# EAGLE board H1maria_placa v167 (EAGLE 9.7.0)
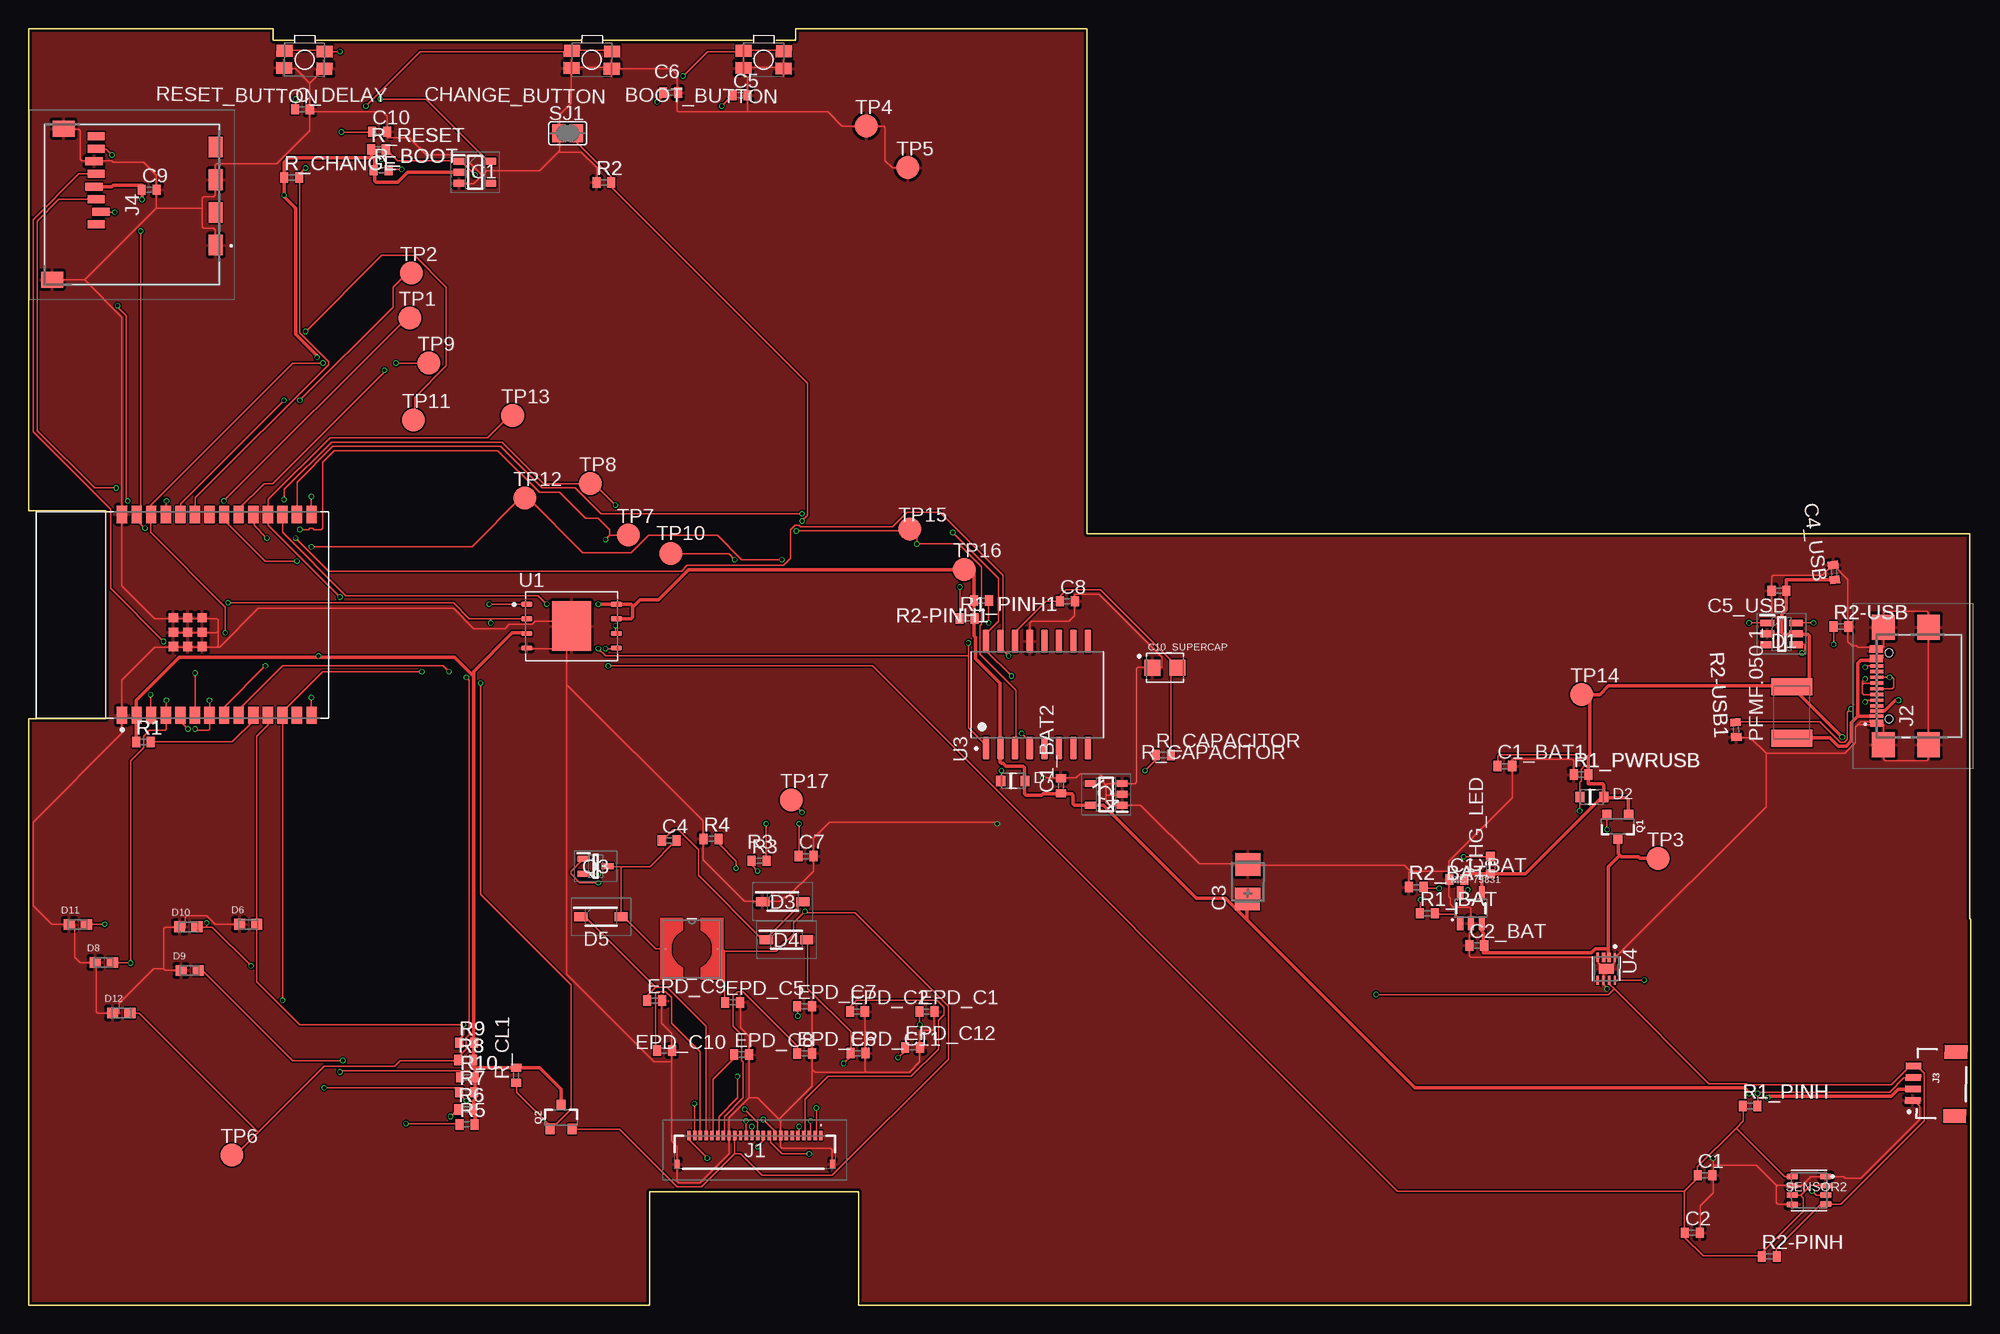
[diagram p0: board, top side]
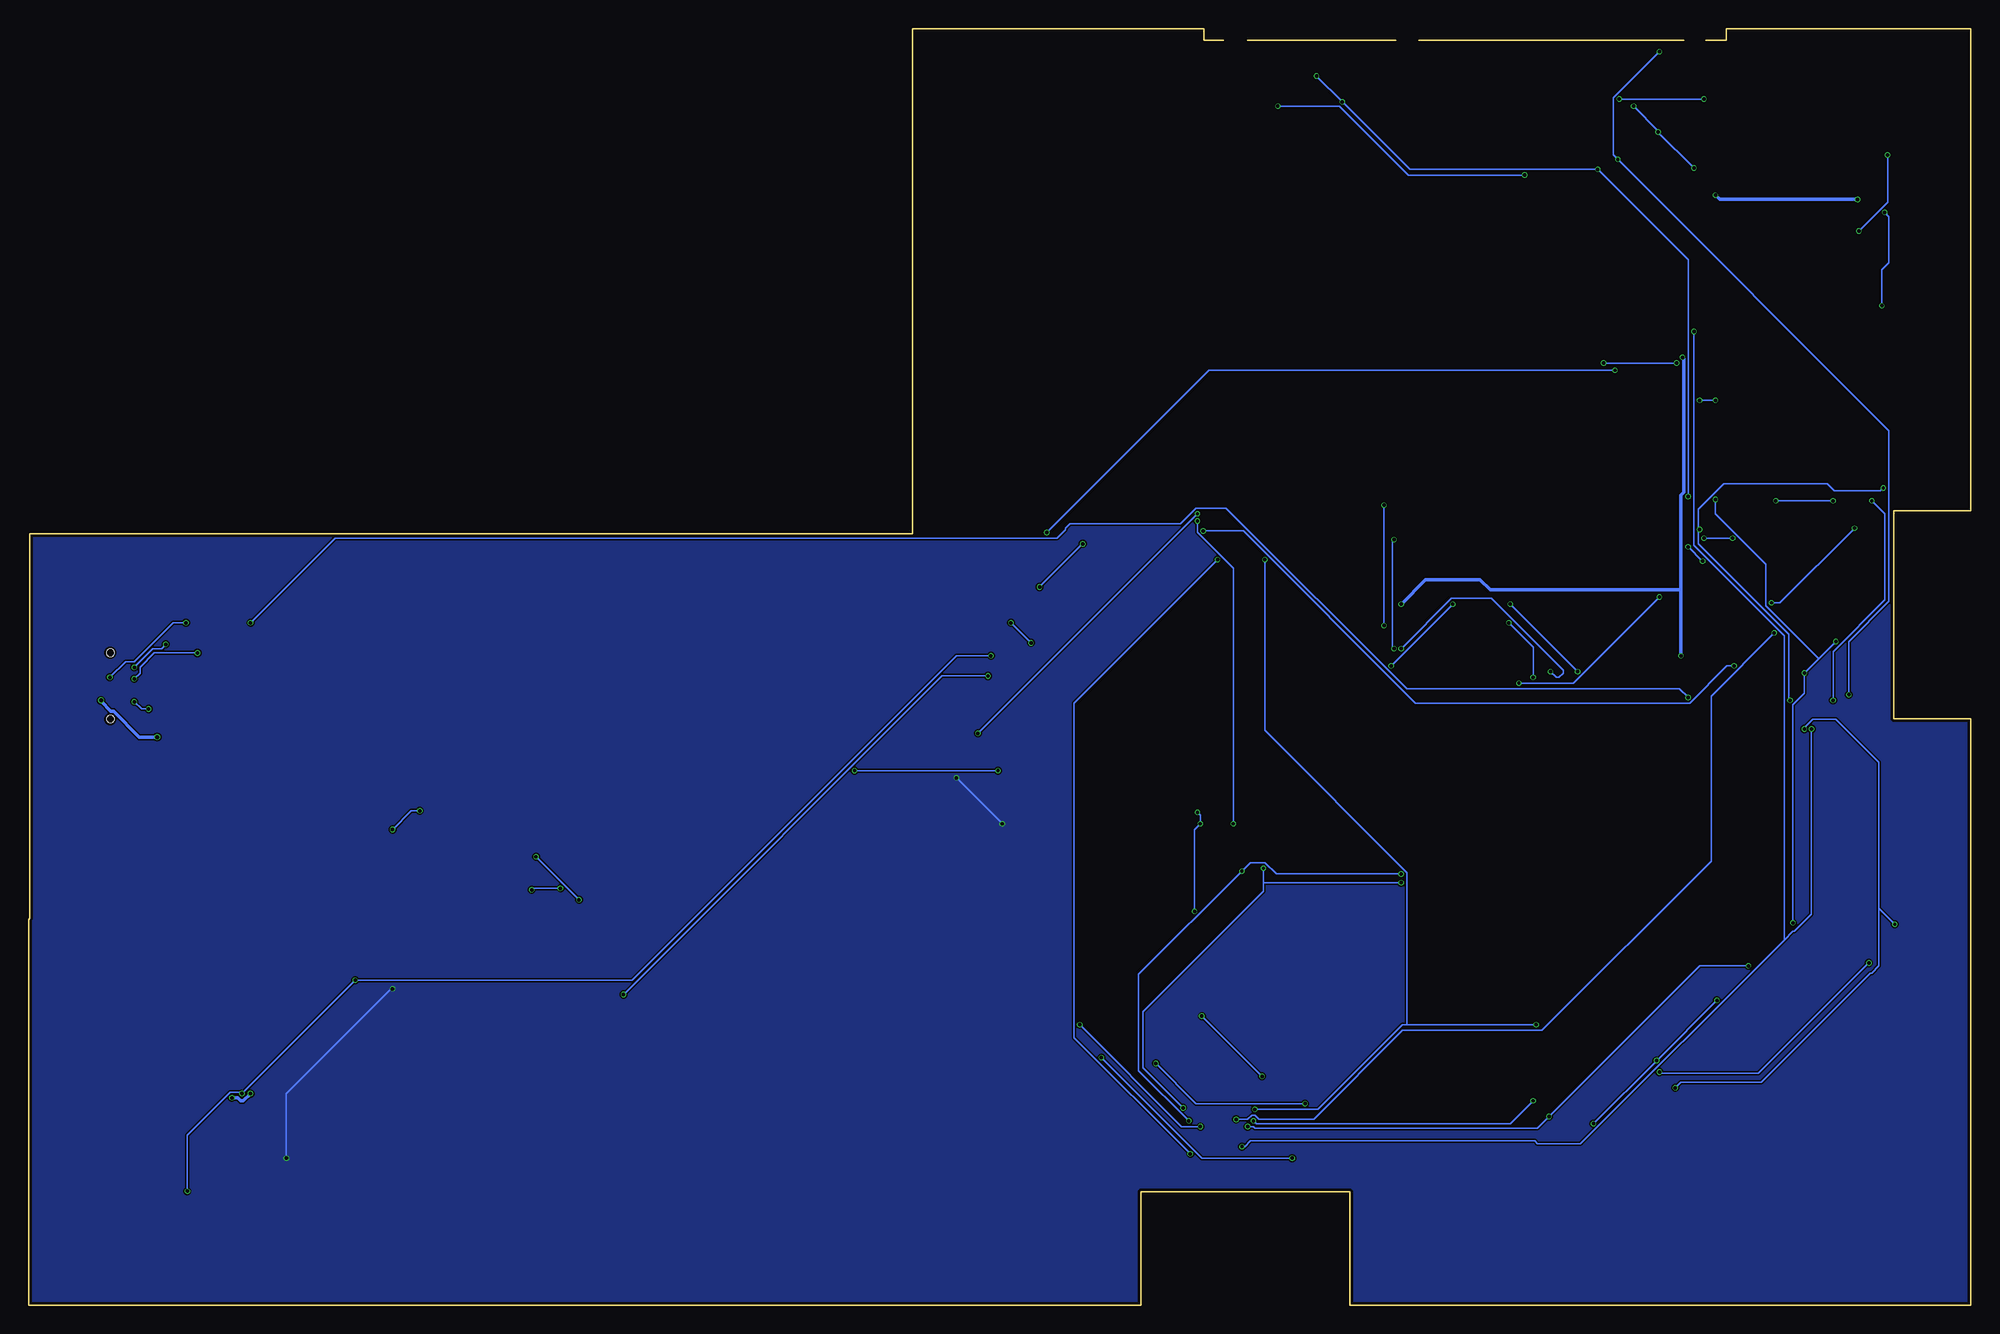
[diagram p1: board, bottom side, seen from below]

Size 169.2 x 111.17 mm. Coordinates in mm from the lower left corner, seen from the top.
Outline: 23.1,110.17 21.3,110.17 21.3,111.17 0,111.17 0,69.17 6.7,69.17 6.7,51.07 0,51.07 0,0 54.1,0 54.1,9.87 72.3,9.87 72.3,0 169.2,0 169.2,33.57 169.1,33.67 169.1,67.17 92.2,67.17 92.2,111.17 66.8,111.17 66.8,110.17 65.1,110.17
Outline: 25,110.17 48.1,110.17
Outline: 50.1,110.17 63,110.17
Copper layers (1*16): Top 0.035mm / dielectric 1.6mm / Bottom 0.035mm
Design rules "jlcpcb-2layers.dru": minimum track width 5mil, minimum drill 0.3mm, track to track 5mil, track to pad 5mil, pad to pad 5mil, via to via 5mil, smd to smd 5mil, copper to edge 0.2mm, drill to drill 6mil, minimum pad ring 10mil, minimum via ring 3mil, stop-mask expansion 4mil, vias tented up to drill 0mil, thermal gap 10mil
Net classes: 0 default: width 0.15 mm; 1 power: width 0.3 mm

## Footprints (pad centres in the part's own frame; a part is rotated, then mirrored left to right if it is on the bottom)
MYBUTTON = smd 1.4 x 1.05: 1 1.75,0.75; 2 -1.75,0.75; 3 -1.75,-0.75; 4 1.75,-0.75
ESP32_WROVER_EAGLE-LTSPICE_C0402 = smd 0.7 x 0.9: 1 -0.65,0; 2 0.65,0
EAGLE-LTSPICE_C0402 = smd 0.7 x 0.9: 1 -0.65,0; 2 0.65,0
RCL_CT3528 = smd 2 x 2.2: + -1.5,0; - 1.5,0
CAPCP3225X100N = smd 1.4 x 1.4: 1 -1.1,0; 2 1.1,0
ADAFRUIT_CHIP-LED0603 = smd 0.8 x 0.8: A 0,-0.75; C 0,0.75
SOT95P280X145-6N = smd 1.2 x 0.6: 1 -1.25,0.95; 2 -1.25,0; 3 -1.25,-0.95; 4 1.25,-0.95; 5 1.25,0; 6 1.25,0.95
ESP32_WROVER_AVX---SD0805S020S1R0_AVX_SD0805S020S1R0_0 = smd 0.8 x 0.9: 1 -1.05,0; 2 1.05,0
SOD3716X135N = smd 1.15 x 0.8: 1 -1.75,0; 2 1.75,0
DIOC1608X36N = smd 0.97 x 0.94: 1 -0.75,0; 2 0.75,0
SOT95P280X125-5N = smd 0.9 x 0.6: 1 -1.4,0.95; 2 -1.4,0; 3 -1.4,-0.95; 4 1.4,-0.95; 5 1.4,0.95
SOT95P280X120-5N = smd 0.9 x 0.6: 1 -1.4,0.95; 2 -1.4,0; 3 -1.4,-0.95; 4 1.4,-0.95; 5 1.4,0.95
FH34SRJ24S05SH99 = smd 0.3 x 0.8: 1 5.75,1.45; 2 5.25,1.45; 3 4.75,1.45; 4 4.25,1.45; 5 3.75,1.45; 6 3.25,1.45; 7 2.75,1.45; 8 2.25,1.45; 9 1.75,1.45; 10 1.25,1.45; 11 0.75,1.45; 12 0.25,1.45; 13 -0.25,1.45; 14 -0.75,1.45; 15 -1.25,1.45; 16 -1.75,1.45; 17 -2.25,1.45; 18 -2.75,1.45; 19 -3.25,1.45; 20 -3.75,1.45; 21 -4.25,1.45; 22 -4.75,1.45; 23 -5.25,1.45; 24 -5.75,1.45 | smd 0.4 x 0.8: MP1 6.75,-1.05; MP2 -6.75,-1.05
SAMACSYS_PARTS_USB4110GFA = smd 0.3 x 1.15: A1 -3.393,3.692; A4 -2.624,3.704; A5 -1.25,3.678; A6 -0.25,3.678; A7 0.25,3.678; A8 1.25,3.678; A9 2.555,3.708; A12 3.37,3.718; B1 3.04,3.749; B4 2.225,3.713; B5 1.75,3.678; B6 0.75,3.678; B7 -0.75,3.678; B8 -1.75,3.678; B9 -2.183,3.684; B12 -3.081,3.704 | smd 2.18 x 2: MP1 -5.11,-0.827; MP2 5.11,-0.827; MP3 -5.11,3.103; MP4 5.11,3.103 | hole 0.65: -2.89,2.603; 2.89,2.603
JST04_1MM_RA = smd 0.6 x 1.35: 1 -1.5,0; 2 -0.5,0; 3 0.5,0; 4 1.5,0 | smd 1.2 x 2: NC1 2.8,-3.675; NC2 -2.8,-3.675
112ATAARR03ATTEND = smd 1.8 x 1.2: G1 10.6,10.4; G2 4.9,10.4; S1 7.75,10.4; S2 2.05,10.4 | smd 1.4 x 1.9: G3 13.6,-3.85; G4 0.45,-2.85 | smd 0.7 x 1.5: P1 8.8,0; P2 7.7,0.4; P3 6.6,0; P4 5.5,-0.2; P5 4.4,0; P6 3.3,-0.2; P7 2.2,0; P8 1.1,0
IND_4828-WE-TPC_WRE = smd 0.127 x 0.127: 1 -2.286,0; 2 2.286,0
ESP32_WROVER_SPARKFUN-IC-POWER_SOT23-5 = smd 0.55 x 1.2: 1 -0.95,-1.3; 2 0,-1.3; 3 0.95,-1.3; 4 0.95,1.3; 5 -0.95,1.3
ESP32C6_VARISTOR_CT/CN1812 = smd 1.5 x 3.6: 1 -2.25,0; 2 2.25,0
ESP32_WROVER_SPARKFUN-DISCRETESEMI_SOT23-3 = smd 0.8 x 0.9: 1 -0.95,-1; 2 0.95,-1; 3 0,1.1
SOT65P210X110-3N = smd 1.05 x 0.5: 1 -1.05,0.65; 2 -1.05,-0.65; 3 1.05,0
ESP32_WROVER_EAGLE-LTSPICE_R0402 = smd 0.7 x 0.9: 1 -0.65,0; 2 0.65,0
ESP32_WROVER_BME680_PSON80P300X300X100-8N = smd 1.016 x 0.5: 1 1.458,1.2; 2 1.458,0.4; 3 1.458,-0.4; 4 1.458,-1.2; 5 -1.458,-1.22; 6 -1.458,-0.4; 7 -1.458,0.4; 8 -1.458,1.2
SJ = smd 1.168 x 1.6: 1 -0.762,0; 2 0.762,0
TP20R = smd 2 x 2: TP 0,0
SON127P600X800X80-9N = smd 0.94 x 0.44: 1 -3.895,1.905; 2 -3.895,0.635; 3 -3.895,-0.635; 4 -3.895,-1.905; 5 3.895,-1.905; 6 3.895,-0.635; 7 3.895,0.635; 8 3.895,1.905 | smd 3.4 x 4.3: 9 0,0
XCVR_ESP32-C6-WROOM-1-N8 = smd 1.5 x 0.9: 1 -8.75,5.26; 2 -8.75,3.99; 3 -8.75,2.72; 4 -8.75,1.45; 5 -8.75,0.18; 6 -8.75,-1.09; 7 -8.75,-2.36; 8 -8.75,-3.63; 9 -8.75,-4.9; 10 -8.75,-6.17; 11 -8.75,-7.44; 12 -8.75,-8.71; 13 -8.75,-9.98; 14 -8.75,-11.25; 15 8.75,-11.25; 16 8.75,-9.98; 17 8.75,-8.71; 18 8.75,-7.44; 19 8.75,-6.17; 20 8.75,-4.9; 21 8.75,-3.63; 22 8.75,-2.36; 23 8.75,-1.09; 24 8.75,0.18; 25 8.75,1.45; 26 8.75,2.72; 27 8.75,3.99; 28 8.75,5.26 | smd 0.8 x 0.8: 29_1 -2.755,0.79; 29_2 -1.505,0.79; 29_3 -0.255,0.79; 29_4 -2.755,-0.46; 29_5 -1.505,-0.46; 29_6 -0.255,-0.46; 29_7 -2.755,-1.71; 29_8 -1.505,-1.71; 29_9 -0.255,-1.71
SOIC127P1032X265-16N = smd 2.05 x 0.59: 1 -4.655,4.445; 2 -4.655,3.175; 3 -4.655,1.905; 4 -4.655,0.635; 5 -4.655,-0.635; 6 -4.655,-1.905; 7 -4.655,-3.175; 8 -4.655,-4.445; 9 4.655,-4.445; 10 4.655,-3.175; 11 4.655,-1.905; 12 4.655,-0.635; 13 4.655,0.635; 14 4.655,1.905; 15 4.655,3.175; 16 4.655,4.445
SON50P200X200X80-9N = smd 0.76 x 0.27: 1 -0.985,0.75; 4 -0.985,-0.75; 5 0.985,-0.75; 6 0.985,-0.25; 7 0.985,0.25; 8 0.985,0.75 | smd 0.813 x 0.406: 2 -0.985,0.25; 3 -0.985,-0.25 | smd 0.9 x 1.3: 9 0,0

## Placement (x,y rotation side)
BOOT_BUTTON  BUTTON_CUSYOMV1  [MYBUTTON]  64.03,108.47 179.3 top
C1  100nF  [ESP32_WROVER_EAGLE-LTSPICE_C0402]  146.05,11.3 0 top
C1_BAT  4.7uF  [EAGLE-LTSPICE_C0402]  124.44,37.06 0 top
C1_BAT1  4.7uF  [EAGLE-LTSPICE_C0402]  128.59,46.94 0 top
C1_BAT2  4.7uF  [EAGLE-LTSPICE_C0402]  89.93,45.24 90 top
C2  100nF  [ESP32_WROVER_EAGLE-LTSPICE_C0402]  144.93,6.3 0 top
C2_BAT  4.7uF  [EAGLE-LTSPICE_C0402]  126.15,31.32 0 top
C3  100uF TANT  [RCL_CT3528]  106.21,36.87 89.5 top
C4  4.7uF/25V  [ESP32_WROVER_EAGLE-LTSPICE_C0402]  55.81,40.46 0 top
C4_USB  100nF  [EAGLE-LTSPICE_C0402]  157.28,63.82 96.8 top
C5  1uF  [EAGLE-LTSPICE_C0402]  61.99,105.38 0 top
C5_USB  4.7uF  [EAGLE-LTSPICE_C0402]  152.49,62.22 180 top
C6  100nF  [EAGLE-LTSPICE_C0402]  55.91,105.6 0 top
C7  10uF  [ESP32_WROVER_EAGLE-LTSPICE_C0402]  67.72,39.1 0 top
C8  100nF  [EAGLE-LTSPICE_C0402]  90.49,61.3 0 top
C9  100nF  [ESP32_WROVER_EAGLE-LTSPICE_C0402]  10.51,97.14 0 top
C10  100nF  [EAGLE-LTSPICE_C0402]  30.57,102.2 0 top
C10_SUPERCAP  CPH3225A  [CAPCP3225X100N]  98.99,55.51 0 top
C_DELAY  100nF  [EAGLE-LTSPICE_C0402]  23.85,104.16 0 top
CHANGE_BUTTON  BUTTON_CUSYOMV1  [MYBUTTON]  49.06,108.47 179.1 top
CHG_LED  [ADAFRUIT_CHIP-LED0603]  127.34,38.32 0 top
D1  USBLC6-2SC6Y  [SOT95P280X145-6N]  152.72,58.46 0 top
D2  SD0805S020S1R0  [ESP32_WROVER_AVX---SD0805S020S1R0_AVX_SD0805S020S1R0_0]  136.19,44.25 0 top
D3  MBR0530  [SOD3716X135N]  65.7,35.14 0 top
D4  MBR0530  [SOD3716X135N]  66.02,31.82 0 top
D5  MBR0530  [SOD3716X135N]  49.86,33.82 0 top
D6  PGB1010603MR  [DIOC1608X36N]  19.12,33.16 0 top
D7  ESP32_WROVER_AVX---SD0805S020S1R0_AVX_SD0805S020S1R0_0_0AVX_SD0805S020S1R0_0_0  [ESP32_WROVER_AVX---SD0805S020S1R0_AVX_SD0805S020S1R0_0]  85.74,45.65 0 top
D8  PGB1010603MR  [DIOC1608X36N]  6.55,29.84 0 top
D9  PGB1010603MR  [DIOC1608X36N]  14.03,29.14 0 top
D10  PGB1010603MR  [DIOC1608X36N]  13.91,32.94 0 top
D11  PGB1010603MR  [DIOC1608X36N]  4.29,33.14 0 top
D12  PGB1010603MR  [DIOC1608X36N]  8.07,25.44 0 top
EPD_C1  0.1uF/50V  [EAGLE-LTSPICE_C0402]  78.25,25.56 0 top
EPD_C2  0.1uF/50V  [EAGLE-LTSPICE_C0402]  72.19,25.56 0 top
EPD_C5  0.1uF/50V  [EAGLE-LTSPICE_C0402]  61.33,26.36 0 top
EPD_C6  1uF/50V  [EAGLE-LTSPICE_C0402]  67.6,21.92 0 top
EPD_C7  1uF/50V  [EAGLE-LTSPICE_C0402]  67.61,26.02 0 top
EPD_C8  1uF/50V  [EAGLE-LTSPICE_C0402]  62.12,21.82 0 top
EPD_C9  1uF/50V  [EAGLE-LTSPICE_C0402]  54.53,26.52 0 top
EPD_C10  1uF/50V  [EAGLE-LTSPICE_C0402]  55.39,22.16 0 top
EPD_C11  1uF/50V  [EAGLE-LTSPICE_C0402]  72.25,21.94 0 top
EPD_C12  1uF/50V  [EAGLE-LTSPICE_C0402]  77.01,22.44 0 top
IC1  BD5229G-TR  [SOT95P280X125-5N]  38.89,98.66 0 top
IC4  XC6220A331MR-G  [SOT95P280X120-5N]  93.87,44.48 180 top
J1  FH34SRJ-24S-0.5SH_99_  [FH34SRJ24S05SH99]  63.27,13.31 0 top
J2  SAMACSYS_PARTS_USB4110-GF-A  [SAMACSYS_PARTS_USB4110GFA]  164.69,53.93 90 top
J3  QWIIC_RIGHT_ANGLE  [JST04_1MM_RA]  164.18,19.33 88.8 top
J4  112A-TAAR-R03_ATTEND  [112ATAARR03ATTEND]  5.89,102.92 270 top
L1  68uH  [IND_4828-WE-TPC_WRE]  57.77,31.02 0 top
MCP73831  ESP32_WROVER_SPARKFUN-IC-POWER_MCP73831  [ESP32_WROVER_SPARKFUN-IC-POWER_SOT23-5]  125.65,34.56 0 top
PFMF.050.1  ESP32C6_VARISTORCN1812  [ESP32C6_VARISTOR_CT/CN1812]  153.6,51.61 90 top
Q1  20V/4.2A/52mΩ/1.4W  [ESP32_WROVER_SPARKFUN-DISCRETESEMI_SOT23-3]  138.44,41.71 180 top
Q2  20V/4.2A/52mΩ/1.4W  [ESP32_WROVER_SPARKFUN-DISCRETESEMI_SOT23-3]  46.38,16.33 0 top
Q3  SI1308EDL-T1-GE3  [SOT65P210X110-3N]  49.39,38.22 0 top
R1  [ESP32_WROVER_EAGLE-LTSPICE_R0402]  10,49.04 0 top
R1_BAT  200  [ESP32_WROVER_EAGLE-LTSPICE_R0402]  121.86,34.12 0 top
R1_PINH  10K  [ESP32_WROVER_EAGLE-LTSPICE_R0402]  149.97,17.34 0 top
R1_PINH1  10K  [ESP32_WROVER_EAGLE-LTSPICE_R0402]  81.76,59.81 0 top
R1_PWRUSB  100K  [ESP32_WROVER_EAGLE-LTSPICE_R0402]  135.25,46.21 0 top
R2  2.2  [ESP32_WROVER_EAGLE-LTSPICE_R0402]  50.11,97.78 0 top
R2-PINH  10K  [ESP32_WROVER_EAGLE-LTSPICE_R0402]  151.63,4.24 0 top
R2-PINH1  10K  [ESP32_WROVER_EAGLE-LTSPICE_R0402]  83.01,61.36 180 top
R2-USB  5k1  [ESP32_WROVER_EAGLE-LTSPICE_R0402]  157.89,59.1 0 top
R2-USB1  5k1  [ESP32_WROVER_EAGLE-LTSPICE_R0402]  148.73,50.11 93.1 top
R2_BAT  2K  [ESP32_WROVER_EAGLE-LTSPICE_R0402]  120.88,36.4 0 top
R3  0.47  [ESP32_WROVER_EAGLE-LTSPICE_R0402]  63.64,38.7 0 top
R4  10K  [ESP32_WROVER_EAGLE-LTSPICE_R0402]  59.46,40.6 0 top
R5  10K  [ESP32_WROVER_EAGLE-LTSPICE_R0402]  38.19,15.74 0 top
R6  10K  [ESP32_WROVER_EAGLE-LTSPICE_R0402]  38.08,17.04 0 top
R7  10K  [ESP32_WROVER_EAGLE-LTSPICE_R0402]  38.17,18.54 0 top
R8  10K  [ESP32_WROVER_EAGLE-LTSPICE_R0402]  38.06,21.34 0 top
R9  10K  [ESP32_WROVER_EAGLE-LTSPICE_R0402]  38.15,22.84 0 top
R10  10K  [ESP32_WROVER_EAGLE-LTSPICE_R0402]  38.22,19.84 0 top
R_BOOT  10K  [ESP32_WROVER_EAGLE-LTSPICE_R0402]  30.72,98.84 0 top
R_CAPACITOR  15  [ESP32_WROVER_EAGLE-LTSPICE_R0402]  98.85,47.91 0 top
R_CHANGE  10K  [ESP32_WROVER_EAGLE-LTSPICE_R0402]  22.92,98.21 0 top
R_CL1  10K  [ESP32_WROVER_EAGLE-LTSPICE_R0402]  42.47,20 89.6 top
R_RESET  10K  [ESP32_WROVER_EAGLE-LTSPICE_R0402]  30.47,100.66 0 top
RESET_BUTTON  BUTTON_CUSYOMV1  [MYBUTTON]  24.03,108.47 178.9 top
SENSOR2  BME688  [ESP32_WROVER_BME680_PSON80P300X300X100-8N]  155.11,9.99 0 top
SJ1  [SJ]  46.96,102.06 0 top
TP1  TPTP20R  [TP20R]  33.23,85.98 0 top
TP2  TPTP20R  [TP20R]  33.35,89.88 0 top
TP3  TPTP20R  [TP20R]  141.97,38.88 0 top
TP4  TPTP20R  [TP20R]  72.99,102.68 0 top
TP5  TPTP20R  [TP20R]  76.59,99.06 0 top
TP6  TPTP20R  [TP20R]  17.71,13.06 0 top
TP7  TPTP20R  [TP20R]  52.23,67.06 0 top
TP8  TPTP20R  [TP20R]  48.95,71.56 0 top
TP9  TPTP20R  [TP20R]  34.87,82.06 0 top
TP10  TPTP20R  [TP20R]  55.96,65.48 0 top
TP11  TPTP20R  [TP20R]  33.51,77.08 0 top
TP12  TPTP20R  [TP20R]  43.21,70.28 0 top
TP13  TPTP20R  [TP20R]  42.16,77.48 0 top
TP14  TPTP20R  [TP20R]  135.31,53.18 0 top
TP15  TPTP20R  [TP20R]  76.76,67.58 0 top
TP16  TPTP20R  [TP20R]  81.51,64.08 0 top
TP17  TPTP20R  [TP20R]  66.46,43.98 0 top
U1  W25Q512JVEIQ  [SON127P600X800X80-9N]  47.29,59.13 0 top
U2  ESP32-C6-WROOM-1-N8  [XCVR_ESP32-C6-WROOM-1-N8]  13.4,60.11 90 top
U3  DS3231SN#  [SOIC127P1032X265-16N]  87.85,53.17 90 top
U4  MAX17048G+T10  [SON50P200X200X80-9N]  137.44,29.29 269.8 top

## Library data of the parts
BOOT_BUTTON CHANGE_BUTTON CHG_LED PFMF.050.1 RESET_BUTTON SJ1 TP1-TP17 = DeskAssistant v19 v1
C1 C1_BAT C1_BAT1 C1_BAT2 C2 C2_BAT C4 C4_USB C5 C5_USB C6-C10 C_DELAY EPD_C1 EPD_C2 EPD_C5-EPD_C12 = DeskAssistant v19 v1; SPICEMODEL: NONE; SPICEPREFIX: C
C3 = DeskAssistant v19 v1; SPICEPREFIX: C
C10_SUPERCAP = DeskAssistant v19 v1; AVAILABILITY: Not in stock; CHECK_PRICES: https://www.snapeda.com/parts/CPH3225A/Seiko+Instruments/view-part/?ref=eda; DESCRIPTION: 11 mF (EDLC) Supercapacitor 3.3 V 1210 (3225 Metric) - -; MF: Seiko Instruments; MP: CPH3225A; PACKAGE: 1210 Seiko; PRICE: None; PURCHASE-URL: https://www.snapeda.com/api/url_track_click_mouser/?unipart_id=562593&manufacturer=Seiko Instruments&part_name=CPH3225A&search_term=None; SNAPEDA_LINK: https://www.snapeda.com/parts/CPH3225A/Seiko+Instruments/view-part/?ref=snap
D1 = DeskAssistant v19 v1; AVAILABILITY: In Stock; CHECK_PRICES: https://www.snapeda.com/parts/USBLC6-2SC6Y/STMicroelectronics/view-part/?ref=eda; DESCRIPTION: 17V Clamp 5A (8/20µs) Ipp Tvs Diode Surface Mount SOT-23-6; MF: STMicroelectronics; MP: USBLC6-2SC6Y; PACKAGE: SOT-23-6 STMicroelectronics; PRICE: None; SNAPEDA_LINK: https://www.snapeda.com/parts/USBLC6-2SC6Y/STMicroelectronics/view-part/?ref=snap
D2 D7 = DeskAssistant v19 v1; CENTROID_NOT_SPECIFIED: No; DATASHEET: http://datasheets.avx.com/schottky.pdf; DIGIKEY_DESCRIPTION: DIODE SCHOTTKY 20V 1A 0805; DIGIKEY_PART_NUMBER: 478-7800-1-ND; LEAD_FREE: yes; MF: AVX; MOUSER_PART_NUMBER: 581-SD0805S020S1R0; PACKAGE: 0805 (2012 metric); PREFIX: D; ROHS: yes; TEMPERATURE_RANGE_HIGH: +125°C; TEMPERATURE_RANGE_LOW: -55°C
D3-D5 = DeskAssistant v19 v1; AVAILABILITY: In Stock; CHECK_PRICES: https://www.snapeda.com/parts/MBR0530/Onsemi/view-part/?ref=eda; DESCRIPTION: Diode Schottky 30 V 500mA Surface Mount SOD-123; MF: ON Semiconductor; MP: MBR0530; PACKAGE: SOD-123-2 ON Semiconductor; PRICE: None; PURCHASE-URL: https://www.snapeda.com/api/url_track_click_mouser/?unipart_id=179458&manufacturer=ON Semiconductor&part_name=MBR0530&search_term=None; SNAPEDA_LINK: https://www.snapeda.com/parts/MBR0530/Onsemi/view-part/?ref=snap
D6 D8-D12 = DeskAssistant v19 v1; AVAILABILITY: In Stock; CHECK_PRICES: https://www.snapeda.com/parts/PGB1010603MR/Littelfuse/view-part/?ref=eda; DESCRIPTION: 150V (Typ) Clamp - Ipp Tvs Diode Surface Mount 0603 (1608 Metric); MF: Littelfuse Inc.; MP: PGB1010603MR; PACKAGE: 0603 Littelfuse Inc.; PRICE: None; PURCHASE-URL: https://www.snapeda.com/api/url_track_click_mouser/?unipart_id=5659453&manufacturer=Littelfuse Inc.&part_name=PGB1010603MR&search_term=None; SNAPEDA_LINK: https://www.snapeda.com/parts/PGB1010603MR/Littelfuse/view-part/?ref=snap
IC1 = DeskAssistant v19 v1; DESCRIPTION: Voltage Detector with Adjustable Delay Time: CMOS processes are utilized to develop high precision, low current consumption CMOS reset ICs that allow arbitrary setting of the delay time. The extensive lineup includes both Nch Open Drain and CMOS output types in a wide range of detection voltages (from 2.3V to 6.0V, in 0.1V steps), enabling selection of the ideal solution based on customer requirements. In addition, the entire series is of course both lead-free and RoHS-compliant.; HEIGHT: 1.25mm; MANUFACTURER_NAME: ROHM Semiconductor; MANUFACTURER_PART_NUMBER: BD5229G-TR; MOUSER_PART_NUMBER: 755-BD5229G-TR; MOUSER_PRICE-STOCK: https://www.mouser.co.uk/ProductDetail/ROHM-Semiconductor/BD5229G-TR?qs=4kLU8WoGk0vvnhrrYwdszw%3D%3D
IC4 = DeskAssistant v19 v1; DESCRIPTION: LDO Voltage Regulators; HEIGHT: 1.2mm; MANUFACTURER_NAME: Torex; MANUFACTURER_PART_NUMBER: XC6220A331MR-G; MOUSER_PART_NUMBER: 865-XC6220A331MR-G; MOUSER_PRICE-STOCK: https://www.mouser.co.uk/ProductDetail/Torex-Semiconductor/XC6220A331MR-G?qs=AsjdqWjXhJ8ZSWznL1J0gg%3D%3D
J1 = DeskAssistant v19 v1; DESCRIPTION: 24 Position FFC, FPC Connector Contacts, Top and Bottom 0.020" (0.50mm) Surface Mount, Right Angle; HEIGHT: 1.1mm; MANUFACTURER_NAME: Hirose; MANUFACTURER_PART_NUMBER: FH34SRJ-24S-0.5SH(99); MOUSER_PART_NUMBER: 798-FH34SRJ24S05SH99; MOUSER_PRICE-STOCK: https://www.mouser.co.uk/ProductDetail/Hirose-Connector/FH34SRJ-24S-0.5SH99?qs=vcbW%252B4%252BSTIpKBl5ap9J8Fw%3D%3D
J2 = DeskAssistant v19 v1; DESCRIPTION: CONN USB 2.0 TYPE-C R/A SMT; HEIGHT: 3.26mm; MANUFACTURER_NAME: GCT (GLOBAL CONNECTOR TECHNOLOGY); MANUFACTURER_PART_NUMBER: USB4110-GF-A; MOUSER_PART_NUMBER: 640-USB4110-GF-A; MOUSER_PRICE-STOCK: https://www.mouser.co.uk/ProductDetail/GCT/USB4110-GF-A?qs=KUoIvG%2F9IlYiZvIXQjyJeA%3D%3D
J3 = DeskAssistant v19 v1; PROD_ID: CONN-13694
J4 = DeskAssistant v19 v1; DESCRIPTION: Micro SD Card Socket, Push-Push Type, Top Mount, SMT, H=1.83mm, 10u; HEIGHT: 1.9mm; MANUFACTURER_NAME: ATTEND; MANUFACTURER_PART_NUMBER: 112A-TAAR-R03 ATTEND
L1 = DeskAssistant v19 v1; COPYRIGHT: Copyright (C) 2024 Ultra Librarian. All rights reserved.; MANUFACTURER_PART_NUMBER: 744043680; MFR_NAME: Wurth Electronics
MCP73831 = DeskAssistant v19 v1; PROD_ID: IC-09995
Q1 Q2 = DeskAssistant v19 v1; PROD_ID: TRAN-14388
Q3 = DeskAssistant v19 v1; AVAILABILITY: In Stock; CHECK_PRICES: https://www.snapeda.com/parts/SI1308EDL-T1-GE3/Vishay+Siliconix/view-part/?ref=eda; DESCRIPTION: Si1308EDL-T1-GE3 N-channel MOSFET Transistor, 1.5 A, 30 V, 3-Pin SC-70 | Siliconix / Vishay SI1308EDL-T1-GE3; MF: Vishay Siliconix; MP: SI1308EDL-T1-GE3; PACKAGE: SOT-323 Vishay Semiconductor; PRICE: None; PURCHASE-URL: https://www.snapeda.com/api/url_track_click_mouser/?unipart_id=274603&manufacturer=Vishay Siliconix&part_name=SI1308EDL-T1-GE3&search_term=None; SNAPEDA_LINK: https://www.snapeda.com/parts/SI1308EDL-T1-GE3/Vishay+Siliconix/view-part/?ref=snap
R1 R1_BAT R1_PINH R1_PINH1 R1_PWRUSB R2 R2-PINH R2-PINH1 R2-USB R2-USB1 R2_BAT R3-R10 R_BOOT R_CAPACITOR R_CHANGE R_CL1 R_RESET = DeskAssistant v19 v1; SPICEMODEL: NONE; SPICEPREFIX: R
SENSOR2 = DeskAssistant v19 v1; AVAILABILITY: Unavailable; DESCRIPTION: Integrated Environmental Unit; MF: Bosch Sensortec; MP: BME680; PACKAGE: LGA-8 Bosch Tools; PRICE: None
U1 = DeskAssistant v19 v1; AVAILABILITY: In Stock; CHECK_PRICES: https://www.snapeda.com/parts/W25Q512JVEIQ/Winbond+Electronics/view-part/?ref=eda; DESCRIPTION: FLASH - NOR Memory IC 512Mb (64M x 8) SPI - Quad I/O 133 MHz 8-WSON (8x6); MF: Winbond Electronics; MP: W25Q512JVEIQ; PACKAGE: Package; PRICE: None; SNAPEDA_LINK: https://www.snapeda.com/parts/W25Q512JVEIQ/Winbond+Electronics/view-part/?ref=snap
U2 = DeskAssistant v19 v1; AVAILABILITY: In Stock; CHECK_PRICES: https://www.snapeda.com/parts/ESP32-C6-WROOM-1-N8/Espressif+Systems/view-part/?ref=eda; DESCRIPTION: Multiprotocol Modules ESP32-C6 module, Wi-Fi 6 in 2.4 GHz band, Bluetooth 5, Zigbee 3.0 and Thread. ESP34-WROOM Compatible - ENGINEERING SAMPLE; MF: Espressif Systems; MP: ESP32-C6-WROOM-1-N8; PACKAGE: None; PRICE: None; SNAPEDA_LINK: https://www.snapeda.com/parts/ESP32-C6-WROOM-1-N8/Espressif+Systems/view-part/?ref=snap
U3 = DeskAssistant v19 v1; AVAILABILITY: In Stock; CHECK_PRICES: https://www.snapeda.com/parts/DS3231SN%23/Analog+Devices/view-part/?ref=eda; DESCRIPTION: Extremely Accurate I²C-Integrated RTC/TCXO/Crystal; MF: Analog Devices; MP: DS3231SN#; PACKAGE: SOIC-16 Maxim; PRICE: None; PURCHASE-URL: https://www.snapeda.com/api/url_track_click_mouser/?unipart_id=99048&manufacturer=Analog Devices&part_name=DS3231SN#&search_term=None; SNAPEDA_LINK: https://www.snapeda.com/parts/DS3231SN%23/Analog+Devices/view-part/?ref=snap
U4 = DeskAssistant v19 v1; AVAILABILITY: In Stock; CHECK_PRICES: https://www.snapeda.com/parts/MAX17048G+T10/Analog+Devices/view-part/?ref=eda; DESCRIPTION: 3µA 1-Cell/2-Cell Fuel Gauge with ModelGauge; MF: Analog Devices; MP: MAX17048G+T10; PACKAGE: TDFN-8 Maxim; PRICE: None; PURCHASE-URL: https://www.snapeda.com/api/url_track_click_mouser/?unipart_id=329239&manufacturer=Analog Devices&part_name=MAX17048G+T10&search_term=None; SNAPEDA_LINK: https://www.snapeda.com/parts/MAX17048G+T10/Analog+Devices/view-part/?ref=snap

## Nets
3V3 [power]: C1_BAT2.1 C3.+ C9.1 D7.2 IC1.2 IC4.5 J3.2 J4.P4 Q2.3 R1.1 R1_PINH1.2 R2-PINH1.2 R5.2 R6.2 R7.2 R8.2 R9.2 R10.2 R_BOOT.1 R_CHANGE.1 R_CL1.2 R_RESET.1 TP16.TP U1.3 U1.7 U1.8 U2.2 U3.2
32KHZ: R2-PINH1.1 U2.9 U3.1
DN: D1.4 J2.A7 J2.B7
DP: D1.6 J2.A6 J2.B6
EPD_3V3: C7.1 EPD_C5.1 J1.15 J1.16 L1.2 Q2.2 TP17.TP
EPD_3V3_C: Q2.1 R_CL1.1 TP13.TP U2.18
EPD_BUSY: J1.9 TP9.TP U2.26
EPD_CS: D6.2 J1.12 R9.1 TP10.TP U2.11
EPD_DC: J1.11 TP11.TP U2.5
EPD_RST: J1.10 TP12.TP U2.21
FLASH_CS: D9.2 R5.1 U1.1 U2.12
GDR: J1.2 Q3.1 R4.2
GND: BOOT_BUTTON.1 BOOT_BUTTON.2 C1.2 C1_BAT1.2 C1_BAT2.2 C1_BAT.1 C2.2 C2_BAT.1 C3.- C4_USB.2 C5.2 C5_USB.2 C6.2 C7.2 C8.2 C9.2 C10.2 C10_SUPERCAP.1 C_DELAY.2 CHANGE_BUTTON.1 CHANGE_BUTTON.2 D1.2 D3.1 D6.1 D8.1 D9.1 D10.1 D11.1 D12.1 EPD_C1.2 EPD_C2.2 EPD_C5.2 EPD_C6.2 EPD_C7.2 EPD_C8.2 EPD_C9.2 EPD_C10.2 EPD_C11.2 EPD_C12.2 IC1.3 IC4.1 IC4.2 IC4.3 J1.8 J1.17 J1.MP1 J1.MP2 J2.A1 J2.A12 J2.B1 J2.B12 J2.MP1 J2.MP2 J2.MP3 J2.MP4 J3.1 J4.G1 J4.G2 J4.G3 J4.G4 J4.P6 MCP73831.2 R1_PWRUSB.1 R2-USB1.1 R2-USB.2 R2.1 R2_BAT.1 R4.1 RESET_BUTTON.1 RESET_BUTTON.2 SENSOR2.1 SENSOR2.5 SENSOR2.7 SJ1.1 TP4.TP TP5.TP U1.4 U1.9 U2.1 U2.28 U2.29_1 U2.29_2 U2.29_3 U2.29_4 U2.29_5 U2.29_6 U2.29_7 U2.29_8 U2.29_9 U3.13 U4.1 U4.4 U4.6 U4.9
GPIO8: R1.2 U2.10
I2C_PW: C1.1 C2.1 R1_PINH.1 R2-PINH.1 SENSOR2.2 SENSOR2.6 SENSOR2.8 U2.17
INT_RTC: R1_PINH1.1 TP15.TP U2.8 U3.3
IO/BOOT: BOOT_BUTTON.3 BOOT_BUTTON.4 C6.1 R_BOOT.2 U2.15
IO/CHANGE: C10.1 CHANGE_BUTTON.3 CHANGE_BUTTON.4 R_CHANGE.2 U2.23
MISO: D12.2 J4.P7 R8.1 TP6.TP U1.2 U2.27
MOSI: D11.2 J1.14 J4.P3 R7.1 TP7.TP U1.5 U2.7
N$1: J2.A5 R2-USB1.2
N$2: J2.B5 R2-USB.1
N$3: C1_BAT1.1 D2.1 Q1.2
N$4: C4.1 D3.2 D4.1
N$5: CHG_LED.C R1_BAT.1
N$6: MCP73831.1 R1_BAT.2
N$7: MCP73831.5 R2_BAT.2
N$8: EPD_C12.1 J1.24
N$9: EPD_C1.1 J1.5
N$10: EPD_C10.1 J1.22
N$11: EPD_C2.1 J1.4
N$12: EPD_C8.1 J1.20
N$13: EPD_C7.1 J1.19
N$14: EPD_C6.1 J1.18
N$15: C_DELAY.1 IC1.5
N$16: D7.1 R_CAPACITOR.1
PREVGH: D5.1 EPD_C9.1 J1.21
PREVGL: D4.2 EPD_C11.1 J1.23
RESE: J1.3 Q3.2 R3.1
RESE': R2.2 R3.2 SJ1.2
RESET: C5.1 IC1.1 R_RESET.2 RESET_BUTTON.3 RESET_BUTTON.4 U2.3
RTC_RST: U2.16 U3.4
RX: TP2.TP U2.24
SCK: D10.2 J1.13 J4.P5 R6.1 TP8.TP U1.6 U2.6
SCL: J3.4 R2-PINH.2 SENSOR2.4 U2.20 U3.16 U4.7
SDA: J3.3 R1_PINH.2 SENSOR2.3 U2.19 U3.15 U4.8
SRC: C4.2 D5.2 L1.1 Q3.3
SS_SD: D8.2 J4.P2 R10.1 U2.4
TX: TP1.TP U2.25
USB_D: D1.3
USB_D+: D1.1 U2.14
USB_D-: U2.13
VBAT [power]: C2_BAT.2 MCP73831.3 Q1.3 TP3.TP U4.2 U4.3
VBUS [power]: C1_BAT.2 C4_USB.1 C5_USB.1 CHG_LED.A D1.5 D2.2 J2.B9 MCP73831.4 PFMF.050.1.2 Q1.1 R1_PWRUSB.2 TP14.TP
VRTC: C8.1 C10_SUPERCAP.2 R_CAPACITOR.2 U3.14
VUSB [power]: J2.A4 J2.A9 J2.B4 PFMF.050.1.1

## Tracks (layer width: path | path; a pad name or v marks a point on that pad's centre or on a via)
3V3  (via drill 0.3)
  Top 0.3: J4.P4 7.25,97.42 7.38,97.55 9.88,97.55 9.88,97.17 C9.1 9.88,97.05 v9.88,96.3 | 29.88,99.92 22.62,99.92 22.25,99.55 22.25,98.3 R_CHANGE.1 22.25,98.17 v22.25,96.67 22.25,96.55 23.25,95.55 23.25,84.55 25.12,82.67 v25.12,82.55 | 29.88,99.92 29.88,100.55 R_RESET.1 | 29.88,99.92 30,99.92 30.12,99.8 30.12,98.92 R_BOOT.1 30.12,98.8 30.12,97.92 30.25,97.8 32.12,97.8 33,98.67 37.38,98.67 IC1.2 | R5.2 38.88,15.8 38.88,16.55 38.75,16.67 38.75,16.92 R6.2 38.75,17.05 38.75,17.8 38.88,17.92 38.88,18.42 R7.2 38.88,18.67 38.88,19.8 R10.2 38.88,19.92 38.88,20.67 | R1.1 9.38,49.05 9.38,51.3 U2.2 9.38,51.42 9.38,52.67 13.12,56.42 25.25,56.42 | 38.88,20.67 38.75,20.67 38.75,21.3 R8.2 38.75,21.42 38.75,22.8 R9.2 38.75,22.92 38.75,54.92 | 38.88,20.67 42.38,20.67 R_CL1.2 42.62,20.67 44.5,20.67 46.38,18.8 46.38,17.55 Q2.3 | 38.75,54.92 38.75,55.17 42.12,58.55 43.38,58.55 U1.3 | 25.25,56.42 37.12,56.42 38.62,54.92 38.75,54.92 | v25.25,56.55 25.25,56.42 | 52.62,60.92 52.62,59.92 52.5,59.8 51.25,59.8 U1.7 | 52.62,60.92 52.5,61.05 51.25,61.05 U1.8 51.12,61.05 v49.62,61.05 | 52.62,60.92 52.75,60.92 53.25,61.42 54.88,61.42 57.5,64.05 81.38,64.05 TP16.TP 81.62,64.05 82.38,64.05 82.38,61.42 R2-PINH1.2 82.38,61.3 82.38,59.92 R1_PINH1.2 82.38,59.67 82.38,58.3 82.5,58.17 82.5,56.3 84.62,54.17 84.62,48.55 U3.2 84.62,48.42 84.62,47.3 84.75,47.17 84.88,47.17 85.12,46.92 86.62,46.92 86.75,46.8 86.75,45.8 D7.2 86.75,45.55 86.75,44.55 86.88,44.42 88.25,44.42 88.38,44.55 89.88,44.55 C1_BAT2.1 90,44.55 90.88,44.55 91,44.42 91,43.67 91.12,43.55 92.38,43.55 IC4.5 92.5,43.55 93.62,43.55 101.75,35.42 104.25,35.42 106,33.67 106.12,33.67
  Top 0.3: v151.5,18.05 151.62,18.17 162.25,18.17 162.88,18.8 164.12,18.8 J3.2 | v149.88,18.42 149.88,18.55 149.5,18.92 120.75,18.92 106.12,33.55 106.12,33.67 | 106.12,33.67 106.12,35.3 C3.+
  Bottom 0.3: v9.88,96.3 21.88,96.3 v22.25,96.67 | v25.12,82.55 25,82.42 25,70.8 25.25,70.55 25.25,62.3 | v25.25,56.55 25.25,62.3 | v151.5,18.05 151,18.05 150.75,17.8 150.5,17.8 v149.88,18.42 | 25.25,62.3 41.88,62.3 42.75,63.17 47.5,63.17 v49.62,61.05
32KHZ  (via drill 0.3)
  Top 0.15: v83.62,59.42 83.62,61.3 R2-PINH1.1 | 81.88,56.55 81.88,50.3 83.38,48.8 83.38,48.55 U3.1 | 81.88,56.55 v81.88,57.67 | v36.62,55.17 36.12,55.67 22.12,55.67 18.25,51.8 18.25,51.42 U2.9 | v49.62,57.17 50.25,56.55 81.88,56.55
  Bottom 0.15: v81.88,57.67 v83.62,59.42 | v36.62,55.17 36.12,54.67 35.88,54.67 35.5,55.05 35.5,55.3 41.75,61.55 45.25,61.55 v49.62,57.17
DN  (via drill 0.3)
  Top 0.15: 159.75,54.05 159.75,53.3 159.88,53.17 J2.B7 | 159.75,54.05 159.88,54.17 J2.A7 | v154.5,56.8 154.75,57.05 154.75,57.55 154,57.55 D1.4 | v160,54.55 159.75,54.3 159.75,54.05
  Bottom 0.15: v154.5,56.8 158.25,56.8 159.5,55.55 159.5,55.05 v160,54.55
DP  (via drill 0.3)
  Top 0.15: J2.A6 161.12,53.67 162.38,53.67 162.5,53.8 162.5,54.55 162.38,54.67 v162.12,54.67 161.12,54.67 J2.B6 | v155.5,59.42 154,59.42 D1.6
  Bottom 0.15: v155.5,59.42 156.62,59.42 160,56.05 160.75,56.05 v162.12,54.67
EPD_3V3  (via drill 0.3)
  Top 0.15: J1.15 62,14.8 61.62,14.8 J1.16 61.5,14.67 61.5,13.17 | 61.5,13.17 58.62,10.3 56.5,10.3 51.5,15.3 47.38,15.3 Q2.2 | 60.62,30.8 60.62,26.42 EPD_C5.1 | 60.62,30.8 60.38,31.05 60,31.05 L1.2 | v67.12,41.92 67.12,39.17 C7.1 | v67.38,42.92 66.38,43.92 TP17.TP | 60.62,30.8 65.12,30.8 66.62,32.3 66.62,33.3 67.5,34.17 | 61.5,13.17 62,13.17 63.88,11.3 70,11.3 80.12,21.42 80.12,26.05 72,34.17 67.5,34.17 | 67.5,34.17 v67.62,34.3
  Bottom 0.15: v67.38,42.92 67.12,42.67 v67.12,41.92 67.62,41.42 v67.62,34.3
EPD_3V3_C  (via drill 0.3)
  Top 0.15: 45.25,15.8 45.38,15.67 45.38,15.42 Q2.1 | 45.25,15.8 42.5,18.55 42.5,19.3 R_CL1.1 | TP13.TP 42.12,77.42 41.88,77.42 40,75.55 26.25,75.55 20.88,70.17 20.88,68.92 U2.18 20.88,68.8 20.88,67.92 v27.12,61.67 | 45.25,15.8 46,15.8 47.25,17.05 47.25,27.92 39.38,35.8 v39.38,54.17
  Bottom 0.15: v39.38,54.17 34.62,54.17 v27.12,61.67
EPD_BUSY  (via drill 0.3)
  Top 0.15: v64,16.17 65,15.17 65,14.8 J1.9 | v17.12,58.55 17.12,60.8 10.62,67.3 10.62,68.8 U2.26 10.62,68.92 10.62,69.67 23,82.05 v25.62,82.05 | v32,82.05 34.75,82.05 TP9.TP
  Bottom 0.15: v64,16.17 63,16.17 62.62,16.55 62.38,16.55 62,16.17 57.25,16.17 49.5,23.92 37.38,23.92 22.62,38.67 22.62,53.05 v17.12,58.55 | v25.62,82.05 v32,82.05
EPD_CS  (via drill 0.3)
  Top 0.15: U2.11 20.88,51.3 20.88,50.55 19.88,49.55 D6.2 19.88,33.05 19.88,28.17 23.62,24.42 v37.88,24.42 37.88,23.55 37.5,23.17 R9.1 | v62.38,17.05 63.5,15.92 63.5,14.8 J1.12 | v61.5,64.92 61,65.42 56,65.42 TP10.TP
  Bottom 0.15: v62.38,17.05 56.88,17.05 49.5,24.42 49.12,24.42 | v37.88,24.42 49.12,24.42 | v61.5,64.92 61.5,50.05 49.12,37.67 49.12,24.42
EPD_DC  (via drill 0.3)
  Top 0.15: v63.5,13.8 64,14.3 64,14.67 J1.11 | v13.88,50.17 13.25,50.8 13.25,51.3 U2.5 | v24.12,84.8 30.75,91.42 33.62,91.42 36.38,88.67 36.38,81.8 33.62,79.05 33.62,77.17 TP11.TP
  Bottom 0.15: v63.5,13.8 63.25,13.8 62.75,14.3 38,14.3 37.75,14.05 34,14.05 16.25,31.8 | 16.25,31.8 15.5,32.55 15.38,32.55 13.88,34.05 v13.88,50.17 | v24.12,84.8 24.12,66.17 16.25,58.3 16.25,31.8
EPD_RST  (via drill 0.3)
  Top 0.15: v68,13.17 65.62,13.17 64.62,14.17 64.62,14.67 J1.10 | v65.62,64.92 62.12,64.92 60,67.05 54,67.05 52.5,65.55 48.25,65.55 43.5,70.3 43.25,70.3 TP12.TP 43.12,70.3 42.88,70.3 38.62,66.05 v24.62,66.05 | v23.38,64.8 20.62,64.8 17,68.42 17,68.8 U2.21
  Bottom 0.15: v68,13.17 78.12,23.3 78.12,52.42 v65.62,64.92 | v24.62,66.05 v23.38,64.8
FLASH_CS  (via drill 0.3)
  Top 0.15: v40.12,61.05 43.38,61.05 U1.1 | v34.25,55.17 25.62,55.17 22.12,51.67 22.12,51.42 U2.12 22.12,51.3 v22.12,26.55 | v32.88,15.8 37.5,15.8 R5.1 | v27.38,21.3 23,21.3 15.12,29.17 14.88,29.17 D9.2
  Bottom 0.15: v34.25,55.17 v40.12,61.05 | v32.88,15.8 v27.38,21.3 v22.12,26.55
GDR  (via drill 0.3)
  Top 0.15: v68.62,17.17 68.62,14.8 J1.2 | v61.62,38.05 61.62,38.67 60.12,40.17 60.12,40.55 R4.2 | v49.62,36.8 48,36.8 47.25,37.55 47.25,37.8 48.25,38.8 Q3.1
  Bottom 0.15: v68.62,17.17 72.12,20.67 72.12,25.55 61.62,36.05 61.62,36.8 | v61.62,38.05 61.62,36.8 | 61.62,36.8 v49.62,36.8
GND  (via drill 0.3)
  Top 0.15: U3.13 87.25,57.92 87.25,59.42 87.38,59.55 90.62,59.55 91.12,60.05 91.12,61.3 C8.2 91.12,61.42 91.12,61.92 93.25,61.92 98.75,56.42 98.75,55.55 98,55.55 C10_SUPERCAP.1 97.88,55.55 96.62,55.55 96.5,55.42 96.5,45.55 96.38,45.42 95.38,45.42 IC4.3 95.25,45.42 94,45.42 93.88,45.3 | 93.88,44.3 93.88,43.8 94.12,43.55 95.25,43.55 IC4.1 95.38,43.55 96.88,43.55 102,38.42 106.12,38.42 C3.- 106.25,38.3 119.88,38.3 120.38,37.8 | 93.88,44.3 94,44.42 95.25,44.42 IC4.2 | 93.88,44.3 93.88,45.3 | 93.88,45.3 93.62,45.55 93.62,45.92 93.25,46.3 91.62,46.3 91.25,45.92 90,45.92 C1_BAT2.2 89.88,45.92 v88.38,45.92 | 151.38,48.05 150,49.42 148.88,49.42 R2-USB1.1 | 159.38,50.55 160.88,50.55 J2.A1 161.62,50.55 161.62,48.92 J2.MP3 161.62,48.8 161.62,47.55 161.75,47.42 165.38,47.42 165.5,47.55 165.5,48.8 J2.MP1 165.5,48.92 165.5,58.92 J2.MP2 165.5,59.05 165.5,60.3 165.38,60.42 161.75,60.42 161.62,60.3 161.62,59.05 J2.MP4 161.62,58.92 161.62,57.3 161.12,57.3 | 159.38,50.55 159.62,50.8 160.88,50.8 J2.B12 | J2.A12 160.88,57.3 159.38,57.3 159.25,57.42 158.88,57.42 158.5,57.8 158.5,59.05 R2-USB.2 158.5,59.17 158.5,63.17 157.25,64.42 C4_USB.2 157.12,64.42 156.25,63.55 152,63.55 151.88,63.42 151.88,62.3 C5_USB.2 151.88,62.17 151.88,60.3 152.38,59.8 152.38,58.55 152.25,58.42 151.5,58.42 D1.2 | 161.12,57.3 161,57.17 161,57.05 J2.B1 | 161.12,57.3 161,57.42 J2.A12 | 161.12,57.3 J2.A12 | C2.2 145.62,6.42 145.62,8.67 146.75,9.8 146.75,11.3 C1.2 146.75,11.42 146.75,12.17 | 152.38,10.42 152.25,10.3 152.25,8.92 152.38,8.8 153.62,8.8 SENSOR2.5 | 152.38,10.42 153.62,10.42 SENSOR2.7 153.75,10.42 154.62,10.42 154.75,10.55 154.75,10.67 155.25,11.17 156.5,11.17 SENSOR2.1 156.62,11.17 158.12,11.17 158.25,11.05 159.62,11.05 164.75,16.17 164.75,17.3 164.25,17.8 J3.1
  Top 0.15: 146.75,12.17 150.5,12.17 152.25,10.42 152.38,10.42 | R1_PWRUSB.1 134.62,46.3 134.62,47.42 134.5,47.55 129.25,47.55 129.25,47.05 C1_BAT1.2 129.25,46.92 129.25,44.17 123.75,38.67 123.75,37.8 | 137.25,29.3 137.38,29.17 U4.9 | 137.25,29.3 136.75,29.8 136.75,30.17 U4.4 136.62,30.3 125.62,30.3 125.5,30.42 C2_BAT.1 125.5,32.42 125.62,32.55 125.62,33.17 MCP73831.2 125.62,33.3 125.62,34.55 125.5,34.67 124.12,34.67 123.88,34.92 123.88,35.42 123.75,35.55 123.75,37.05 C1_BAT.1 123.75,37.17 123.75,37.8 | 137.25,29.3 137.25,28.42 U4.6 137.25,28.3 137.25,27.92 137.5,27.67 v137.5,27.55 | 137.25,29.3 U4.9 | U4.9 137.5,29.17 138.12,29.8 138.12,30.17 U4.1 138.25,30.3 151.38,43.42 151.38,48.05 | 120.38,37.8 120.25,37.67 120.25,36.42 R2_BAT.1 | 123.75,37.8 120.38,37.8 | v146.75,12.8 146.75,12.17 | EPD_C7.2 68.25,25.92 EPD_C6.2 68.25,20.55 | EPD_C2.2 72.88,25.55 72.88,22.05 EPD_C11.2 72.88,21.92 72.88,20.42 73,20.3 | EPD_C1.2 78.88,25.55 78.88,24.05 78.75,23.92 77.75,23.92 77.62,23.8 77.62,22.55 EPD_C12.2 77.62,22.42 77.62,21.17 76.75,20.3 73,20.3 | 68.25,20.55 68.5,20.3 73,20.3 | J1.MP1 70,12.3 70,13.55 69.88,13.67 65.62,13.67 65.5,13.8 65.5,14.67 J1.8 65.5,14.8 65.5,16.05 65.38,16.17 | EPD_C5.2 62,26.3 62,24.17 62.75,23.42 62.75,21.92 EPD_C8.2 62.75,21.8 62.75,18.05 | EPD_C9.2 55.12,26.42 55.12,24.55 56,23.67 56,22.17 EPD_C10.2 56,22.05 56,21.17 | 56,21.17 56,14.3 56.5,13.8 56.5,12.3 J1.MP2 56.5,12.17 56.5,10.8 56.62,10.67 58.5,10.67 61,13.17 61,14.67 J1.17 61,14.8 61,16.3 62.75,18.05 | 65.38,16.17 63.5,18.05 62.75,18.05 | 68.25,20.55 68.25,19.05 65.38,16.17
  Top 0.15: 46.88,57.17 43.5,57.17 U1.4 | 46.88,57.17 47.25,57.55 47.25,59.05 U1.9 | 46.88,54.05 46.88,57.17 | 46.88,54.05 58.75,42.17 58.75,40.67 R4.1 58.75,40.55 58.75,38.8 62.38,35.17 63.88,35.17 D3.1 64,35.17 65.5,35.17 65.88,35.55 66.12,35.55 68.38,37.8 68.38,39.05 C7.2 68.38,39.17 68.38,40.67 69.75,42.05 84.25,42.05 v84.38,41.92 | 46.88,57.17 U1.9 | 56,21.17 54.5,21.17 46.88,28.8 46.88,54.05 | 11.75,29.3 11.75,32.8 11.88,32.92 13.12,32.92 D10.1 13.25,32.92 13.62,32.92 13.62,33.8 13.75,33.92 15.5,33.92 16.25,33.17 18.25,33.17 D6.1 | 11.75,29.3 11.88,29.17 13.25,29.17 D9.1 | 11.75,29.3 10.88,29.3 7.88,26.3 7.88,25.42 7.38,25.42 D12.1 7.25,25.42 6,25.42 5.88,25.55 5.88,29.67 6,29.8 5.88,29.92 D8.1 5.75,29.8 4.5,29.8 4,30.3 4,33.17 3.62,33.17 D11.1 3.5,33.17 2,33.17 0.38,34.8 0.38,42.05 8.12,49.8 8.12,51.3 U2.1 8.12,51.42 8.12,54.42 11,57.3 12.5,57.3 U2.29_1 12.62,57.3 13.75,57.3 U2.29_4 13.88,57.3 15,57.3 U2.29_7 15.12,57.3 16.38,57.3 | U2.29_2 12.62,58.55 13.75,58.55 U2.29_5 13.88,58.55 15,58.55 U2.29_8 15.12,58.55 16.38,58.55 16.5,58.67 | 16.5,58.67 16.5,59.67 16.38,59.8 15.12,59.8 U2.29_9 15,59.8 13.88,59.8 U2.29_6 13.75,59.8 12.62,59.8 U2.29_3 12.5,59.8 11,59.8 8.12,62.67 8.12,68.8 U2.28 8.12,68.92 8.12,86.05 4.88,89.3 | 16.38,57.3 16.5,57.42 16.5,58.67 | 24.5,106.42 C_DELAY.2 | 24.5,106.42 25.75,107.67 RESET_BUTTON.2 | 24.5,103.92 30.88,103.92 31.25,103.55 31.25,102.3 C10.2 31.25,102.17 31.25,101.67 33.12,101.67 34.62,100.17 38,100.17 38.25,99.92 38.25,99.67 39.5,98.42 | C_DELAY.2 24.5,103.92 | 24.5,106.42 23.25,107.67 22.38,107.67 RESET_BUTTON.1
  Top 0.15: 15.12,95.55 15.12,96.42 15.25,96.55 16.12,96.55 16.25,96.67 16.25,97.92 J4.G2 16.25,98.05 16.25,99.3 16.38,99.42 21.62,99.42 24.5,102.3 24.5,103.92 | 15.12,95.55 15.12,93.92 15.25,93.8 16.12,93.8 16.25,93.67 16.25,92.42 J4.G1 | 4.88,89.3 2.12,89.3 J4.G3 | 11.12,95.55 4.88,89.3 | 11.12,95.55 11.12,97.05 C9.2 11.12,97.17 11.12,98.42 10,99.55 7.38,99.55 7.25,99.67 5.75,99.67 J4.P6 5.62,99.67 4.62,99.67 4.5,99.8 4.5,102.3 4.38,102.42 3.12,102.42 J4.G4 | 11.12,95.55 15.12,95.55 | 24.5,104.05 C_DELAY.2 | 39.5,98.42 39.88,98.8 44.5,98.8 46.12,100.42 | 39.5,98.42 38.75,97.67 37.5,97.67 IC1.3 | 46.12,100.42 46.25,100.55 46.25,102.05 SJ1.1 46.25,102.17 46.25,103.67 47.25,104.67 47.25,107.67 CHANGE_BUTTON.1 47.38,107.8 50.75,107.8 CHANGE_BUTTON.2 50.88,107.67 56,107.67 56.5,107.17 56.5,105.67 C6.2 56.5,105.55 56.5,104.05 56.62,103.92 62.5,103.92 | 46.12,100.42 48.12,100.42 49.5,99.05 49.5,97.8 R2.1 | TP5.TP 76.5,99.05 75.25,99.05 74.62,99.67 74.62,102.55 74.5,102.67 TP4.TP 72.88,102.67 70.88,102.67 69.62,103.92 62.5,103.92 | 62.5,103.92 62.62,104.05 62.62,105.3 C5.2 62.62,105.42 62.62,106.92 62.38,107.17 62.38,107.67 BOOT_BUTTON.1 62.38,107.8 65.75,107.8 BOOT_BUTTON.2 | 16.38,57.3 16.62,57.3 20,60.67 37,60.67 38.75,58.92 41.5,58.92 41.88,59.3 43.88,59.3 44.12,59.55 47.25,59.55 47.25,59.17 U1.9 | 159.38,50.55 159.16,50.33 159.16,48.99 158.21,48.05 151.38,48.05
  Bottom 0.15: v146.75,12.8 146.75,18.42 137.62,27.55 v137.5,27.55 | v84.38,41.92 v88.38,45.92
  pour Top: -14.34,113.71 -14.32,113.69 -14.32,112.06 -14.34,112.03 -14.36,112.01 -14.38,112 -14.42,112 -14.44,112.01 -14.46,112.03 -14.48,112.06 -14.48,113.24 -17.32,116.09 -17.32,-5.3 -15.27,-7.35 182.57,-7.35 183.82,-6.1 183.82,119.14 183.57,119.4 -15.57,119.4 -17.99,116.97 -17.58,116.55 -17.58,116.56 -17.58,116.79 -17.56,116.81 -17.54,116.84 -17.52,116.85 -17.48,116.85 -17.46,116.84
  pour Bottom: -22.22,-14.84 -22.24,-14.87 -30.22,-22.85 171.87,-22.85 186.72,-8 186.72,104.99 186.74,105.01 188.32,106.6 188.32,112.4 -23.07,112.4 -23.92,111.54 -23.92,110.2 -23.06,109.34 -22.48,109.5 -22.46,109.52 -22.46,109.53 -22.48,109.56 -22.48,109.59 -22.46,109.61 -22.44,109.64 -22.42,109.65 -22.28,109.65 -22.26,109.64 -22.24,109.61 -22.22,109.59 -22.22,109.5 -17.94,105.21 -17.92,105.19 -17.92,104.36 -17.94,104.33 -17.96,104.31 -17.98,104.3 -18.22,104.3 -18.24,104.31 -22.22,108.29
GPIO8
  Top 0.15: R1.2 10.75,49.05 17.75,49.05 19.62,50.92 19.62,51.3 U2.10
I2C_PW  (via drill 0.3)
  Top 0.15: 154.38,9.55 153.75,9.55 SENSOR2.6 | 154.38,9.55 155.25,10.42 156.5,10.42 SENSOR2.2 | 144.25,9.92 144.25,6.42 C2.1 144.25,6.3 144.25,5.92 145.88,4.3 150.88,4.3 R2-PINH.1 151,4.3 151,4.55 154.62,8.17 154.62,9.3 154.38,9.55 | 144.25,9.92 145.38,11.05 145.38,11.3 C1.1 145.38,11.42 145.38,12.05 148.75,15.42 | 148.75,15.42 149.38,16.05 149.38,17.3 R1_PINH.1 | 148.75,15.42 153,11.17 153.62,11.17 SENSOR2.8 | v45.12,61.05 44.38,61.8 27.62,61.8 22.12,67.3 22.12,68.8 U2.17 | v50.5,55.67 73.5,55.67 119.25,9.92 144.25,9.92
  Bottom 0.15: v50.5,55.67 v45.12,61.05
INT_RTC  (via drill 0.3)
  Top 0.15: v81.12,62.55 81.12,59.92 R1_PINH1.1 | v20.62,55.67 17,52.05 17,51.42 U2.8 | v66.88,67.42 76.5,67.42 76.75,67.67 TP15.TP 76.88,67.55 77.12,67.55 77.38,67.3 v77.38,66.3 81,66.3 83,64.3 83,59.3 82.88,59.17 82.88,56.67 86,53.55 86,48.55 U3.3
  Bottom 0.15: v77.38,66.3 v81.12,62.55 | v20.62,55.67 21.25,55.67 24.5,52.42 48.38,52.42 63.38,67.42 v66.88,67.42
IO/BOOT  (via drill 0.3)
  Top 0.15: BOOT_BUTTON.3 65.75,109.3 62.38,109.3 BOOT_BUTTON.4 62.25,109.17 59.12,109.17 v57,107.05 | v32.5,98.92 31.38,98.92 R_BOOT.2 | v54.75,104.8 55.25,105.3 55.25,105.55 C6.1 | v24.62,70.42 24.62,68.92 U2.15
  Bottom 0.15: v24.62,70.42 24.62,91.05 v32.5,98.92 48.88,98.92 v54.75,104.8 v57,107.05
IO/CHANGE  (via drill 0.3)
  Top 0.15: CHANGE_BUTTON.3 50.75,109.3 47.38,109.3 CHANGE_BUTTON.4 47.25,109.17 34.12,109.17 v29.38,104.42 | U2.23 14.5,68.92 14.5,70.3 26.12,81.92 26.12,82.17 23.62,84.67 23.62,98.17 R_CHANGE.2 23.62,98.3 23.62,98.55 v24.12,99.05 | v27.25,102.17 29.88,102.17 C10.1
  Bottom 0.15: v24.12,99.05 v27.25,102.17 27.25,102.3 v29.38,104.42
MISO  (via drill 0.3)
  Top 0.15: 20,15.05 18,13.05 17.75,13.05 TP6.TP | 20,15.05 25.75,20.8 31.88,20.8 32.38,21.3 37.38,21.3 R8.1 37.5,21.42 37.5,21.67 38.12,22.3 38.12,23.3 38.38,23.55 38.38,54.42 v38.12,54.67 | 20,15.05 9.62,25.42 8.88,25.42 D12.2 | 40.25,59.8 38.38,59.8 37,61.17 v17.38,61.17 | 40.25,59.8 43.38,59.8 U1.2 | v10.12,67.67 9.38,68.42 9.38,68.8 U2.27 9.38,68.92 9.38,69.17 9.75,69.55 v9.75,93.55 | v7.25,100.17 6.75,100.67 6,100.67 J4.P7 | 40.25,59.8 v40.25,59.42
  Bottom 0.15: v17.38,61.17 16.62,61.17 v10.12,67.67 | v7.25,100.17 7.25,96.05 v9.75,93.55 | v38.12,54.67 38.12,57.3 v40.25,59.42
MOSI  (via drill 0.3)
  Top 0.15: v62.5,16.05 62.5,14.8 J1.14 | v38.12,17.8 37.62,18.3 37.5,18.3 37.5,18.42 R7.1 37.5,18.55 37.5,18.92 v25.75,18.92 | v50.25,57.17 51.12,57.17 U1.5 | 50.62,67.05 v50.25,66.67 | 50.62,67.05 52.12,67.05 TP7.TP | v6.62,33.17 5.12,33.17 D11.2 | v14.5,50.17 14.62,50.05 15.62,50.05 15.75,50.17 15.75,51.3 U2.7 15.75,51.42 v15.75,52.67 | v7.62,71.17 5.75,71.17 0.75,76.17 0.75,94.42 2.62,96.3 5.88,96.3 J4.P3 | 50.62,67.05 50.62,67.55 49.62,68.55 48.5,68.55 46.25,70.8 44.5,70.8 40.88,74.42 26.62,74.42 25.62,73.42 25.62,67.67 25.5,67.55 24.88,67.55 24.75,67.67 24.5,67.67 24.38,67.55 v23.62,67.55
  Bottom 0.15: v62.5,16.05 62.25,15.8 40.12,15.8 v38.12,17.8 | v50.25,57.17 50.38,57.3 50.38,66.55 v50.25,66.67 | 8,34.55 v6.62,33.17 | 8,34.55 8,47.3 11.75,51.05 13.75,51.05 14.5,50.3 v14.5,50.17 | v7.62,71.17 7.88,70.92 11.88,70.92 12.5,71.55 21.5,71.55 23.75,69.3 23.75,67.55 | 23.75,67.55 23.75,66.3 15.88,58.42 15.88,52.8 v15.75,52.67 | 23.75,67.55 v23.62,67.55 | v25.75,18.92 25.25,19.42 18.25,19.42 8.75,28.92 8.62,28.92 8,29.55 8,34.55
N$1  (via drill 0.3)
  Top 0.15: v160,52.55 160.12,52.67 J2.A5 | R2-USB1.2 148.75,50.8 156.03,50.8 157.81,49.02 158.19,49.02 158.45,49.28 158.45,51.62 v158.75,51.92
  Bottom 0.15: v158.75,51.92 159.38,51.92 v160,52.55
N$2  (via drill 0.3)
  Top 0.15: v157.25,57.55 157.25,59.05 R2-USB.1 | v160,55.55 160.12,55.67 J2.B5
  Bottom 0.15: v157.25,57.55 157.62,57.17 158.38,57.17 v160,55.55
N$3  (via drill 0.3)
  Top 0.15: C1_BAT1.1 128,47.05 128,47.8 128.12,47.92 134.75,47.92 135.5,47.17 135.5,46.92 135.25,46.67 135.25,45.67 135.12,45.55 135.12,44.3 D2.1 135.12,44.17 v135.12,43.05 | v137.5,41.42 137.5,42.67 Q1.2
  Bottom 0.15: v137.5,41.42 135.88,43.05 v135.12,43.05
N$4
  Top 0.15: C4.1 55.25,40.55 56.12,41.42 56.62,41.42 58.38,39.67 58.38,37.42 64,31.8 64.25,31.8 D4.1 64.25,31.92 67.38,35.05 D3.2
N$5  (via drill 0.3)
  Top 0.15: v125,39.05 127.25,39.05 CHG_LED.C | v121.25,35.3 121.25,34.17 R1_BAT.1
  Bottom 0.15: v125,39.05 v121.25,35.3
N$6
  Top 0.15: R1_BAT.2 122.62,34.05 124.25,34.05 124.75,33.55 124.75,33.3 MCP73831.1
N$7  (via drill 0.3)
  Top 0.15: v122.88,36.3 121.62,36.3 R2_BAT.2 | v125.38,36.17 125.25,36.05 124.75,36.05 124.62,35.92 MCP73831.5
  Bottom 0.15: v122.88,36.3 125.25,36.3 v125.38,36.17
N$8  (via drill 0.3)
  Top 0.15: v59.12,12.8 57.5,14.42 57.5,14.67 J1.24 | v75.75,21.55 76.38,22.17 76.38,22.42 EPD_C12.1
  Bottom 0.15: v59.12,12.8 67,12.8 v75.75,21.55
N$9  (via drill 0.3)
  Top 0.15: v67.12,15.55 67.12,14.8 J1.5 | v77.62,24.42 77.62,25.55 EPD_C1.1
  Bottom 0.15: v67.12,15.55 68.75,15.55 v77.62,24.42
N$10
  Top 0.15: J1.22 58.5,14.8 58.5,22.05 56,24.55 56,26.8 55.5,27.3 54.75,27.3 54.62,27.17 54.62,22.17 EPD_C10.1
N$11
  Top 0.15: J1.4 67.62,14.8 67.62,17.92 69.62,19.92 76.88,19.92 79.25,22.3 79.25,24.8 79.75,25.3 79.75,25.92 79.12,26.55 72.12,26.55 71.5,25.92 71.5,25.67 EPD_C2.1
N$12
  Top 0.15: J1.20 59.62,14.8 59.62,19.67 61.5,21.55 61.5,21.8 EPD_C8.1
N$13  (via drill 0.3)
  Top 0.15: v61.75,19.92 61.75,18.05 60.12,16.42 60.12,14.8 J1.19 | v67,25.17 67,25.92 EPD_C7.1
  Bottom 0.15: v67,25.17 v61.75,19.92
N$14
  Top 0.15: J1.18 60.62,14.8 60.62,16.42 62.25,18.05 62.25,21.17 62.12,21.3 62.12,23.55 61.38,24.3 61.38,26.92 61.75,27.3 62.25,27.3 67,22.55 67,21.92 EPD_C6.1
N$15  (via drill 0.3)
  Top 0.15: v23.25,105.05 23.25,104.17 C_DELAY.1 | v30.62,105.05 34.62,105.05 40,99.67 40.25,99.67 IC1.5
  Bottom 0.15: v30.62,105.05 v23.25,105.05
N$16  (via drill 0.3)
  Top 0.15: v84.75,46.55 84.75,45.67 D7.1 | v97.25,46.55 98.25,47.55 98.25,47.8 R_CAPACITOR.1
  Bottom 0.15: v84.75,46.55 v97.25,46.55
PREVGH
  Top 0.15: 54.62,27.67 55.62,27.67 59,24.3 59,14.8 J1.21 | 54.62,27.67 53.88,26.92 53.88,26.55 EPD_C9.1 | 54.62,27.67 48.5,33.8 48.12,33.8 D5.1
PREVGL  (via drill 0.3)
  Top 0.15: v58,17.55 58,14.8 J1.23 | v71,21.05 71.62,21.67 71.62,21.92 EPD_C11.1 71.62,22.05 71.62,23.8 67.88,27.55 67.88,31.8 D4.2
  Bottom 0.15: v58,17.55 67.5,17.55 v71,21.05
RESE  (via drill 0.3)
  Top 0.15: v68.12,16.05 68.12,14.8 J1.3 | v63.5,37.8 63,38.3 63,38.67 R3.1 | v49.62,37.55 48.38,37.55 Q3.2
  Bottom 0.15: v68.12,16.05 72.5,20.42 72.5,28.8 v63.5,37.8 62.75,38.55 61.5,38.55 60.5,37.55 v49.62,37.55
RESE'  (via drill 0.3)
  Top 0.15: v64.25,41.92 64.25,38.8 R3.2 | v67.38,68.3 67.88,68.8 67.88,80.3 50.75,97.42 50.75,97.67 R2.2 50.75,97.8 50.75,98.3 47.75,101.3 47.75,102.05 SJ1.2
  Bottom 0.15: v64.25,41.92 64.25,64.17 67.38,67.3 v67.38,68.3
RESET  (via drill 0.3)
  Top 0.15: RESET_BUTTON.4 22.38,109.3 25.75,109.3 RESET_BUTTON.3 25.88,109.17 v27.12,109.17 | v60.38,104.42 61.25,105.3 C5.1 | v38.88,98.42 37.62,99.67 37.5,99.67 IC1.1 37.38,99.67 32.12,99.67 R_RESET.2 31.12,100.55 31.12,100.17 v30.75,99.8 | v10.62,53.17 10.62,51.42 U2.3
  Bottom 0.15: v60.38,104.42 55,104.42 49,98.42 v38.88,98.42 | v10.62,53.17 10.62,57.8 7.12,61.3 7.12,76.17 v30.75,99.8 31.12,100.17 31.12,105.17 v27.12,109.17
RTC_RST  (via drill 0.3)
  Top 0.15: v67.38,68.92 49.88,68.92 47.62,71.17 44.75,71.17 41.12,74.8 26.5,74.8 23.38,71.67 23.38,68.92 U2.16 | v86.5,49.8 87.25,49.05 87.25,48.55 U3.4
  Bottom 0.15: v86.5,49.8 v67.38,68.92
RX  (via drill 0.3)
  Top 0.15: v22.25,78.8 13.25,69.8 13.25,68.92 U2.24 | v23.62,78.8 31.75,86.92 31.75,88.67 33,89.92 33.25,89.92 TP2.TP
  Bottom 0.15: v23.62,78.8 v22.25,78.8
SCK  (via drill 0.3)
  Top 0.15: v63,15.55 63,14.8 J1.13 | v36.75,16.42 37.38,17.05 R6.1 | 15.5,32.92 16,32.92 v19.38,29.55 | 15.5,32.92 14.75,32.92 D10.2 | v51.12,59.17 51.12,58.55 U1.6 | v51.12,69.67 49.25,71.55 49,71.55 TP8.TP 48.88,71.55 44.88,71.55 41.25,75.17 26.38,75.17 22.25,71.05 v22.25,70.17 | v11.75,57.8 7.12,62.42 7.12,69.3 0.38,76.05 0.38,94.55 4.38,98.55 5.88,98.55 J4.P5 | v14.5,55.05 14.5,51.42 U2.6 | v15.5,33.3 15.5,32.92
  Bottom 0.15: v63,15.55 62.5,15.55 62.38,15.42 37.75,15.42 v36.75,16.42 23.62,29.55 v19.38,29.55 | v51.12,69.67 v51.12,59.17 | 13.25,56.3 v14.5,55.05 14.5,53.3 15.5,52.3 v15.5,33.3 | 13.25,56.3 v11.75,57.8 | v22.25,70.17 22.25,68.92 17.88,64.55 17.88,60.92 13.25,56.3
SCL  (via drill 0.3)
  Top 0.15: R2-PINH.2 152.25,4.3 152.25,4.92 156.12,8.8 156.5,8.8 SENSOR2.4 156.62,8.8 157.88,8.8 165.12,16.05 165.12,20.17 164.5,20.8 164.25,20.8 J3.4 164.12,20.8 163.88,20.8 162.25,19.17 149.75,19.17 149.62,19.3 146.38,19.3 138.12,27.55 | 138.12,27.55 137.75,27.92 137.75,28.3 U4.7 | v31,81.42 31,81.3 21.25,71.55 20.5,71.55 18.25,69.3 18.25,68.92 U2.20 | v80.5,67.3 84.5,63.3 84.5,59.55 83.38,58.42 83.38,57.92 U3.16 83.38,57.8 83.38,57.05 v85.62,54.8 | 138.12,27.55 137.62,27.05 v117.38,27.05
  Bottom 0.15: v31,81.42 66.38,81.42 v80.5,67.3 | v117.38,27.05 89.62,54.8 v85.62,54.8
SDA  (via drill 0.3)
  Top 0.15: v140.75,28.3 138.25,28.3 U4.8 | R1_PINH.2 150.62,17.42 v150.62,18.42 150.75,18.55 162.12,18.55 163.38,19.8 164.12,19.8 J3.3 | v155.38,9.92 155.75,9.55 156.5,9.55 SENSOR2.3 | v20.75,66.8 19.62,67.92 19.62,68.8 U2.19 | v23.25,66.8 26.12,63.92 56.88,63.92 57.38,64.42 65.75,64.42 66.38,65.05 66.38,67.55 66.75,67.92 67.12,67.92 67.25,67.8 75.25,67.8 76.5,69.05 79.38,69.05 84.88,63.55 84.88,58.42 84.62,58.17 84.62,57.92 U3.15 84.62,57.8 84.62,57.3 v85.38,56.55
  Bottom 0.15: 150.5,18.55 v140.75,28.3 116.62,28.3 88.38,56.55 v85.38,56.55 | v155.38,9.92 155.38,14.8 151.62,18.55 150.5,18.55 | 150.5,18.55 v150.62,18.42 | v23.25,66.8 v20.75,66.8
SRC
  Top 0.15: 51.62,38.17 50.5,38.17 Q3.3 | 51.62,38.17 54.12,38.17 56.38,40.42 C4.2 | 51.62,38.17 51.62,33.92 D5.2 51.62,33.8 51.88,33.8 54.62,31.05 55.5,31.05 L1.1
SS_SD  (via drill 0.3)
  Top 0.15: v27.12,20.3 27.25,20.42 37.62,20.42 37.62,19.92 R10.1 | D8.2 7.38,29.8 v8.88,29.8 8.88,47.42 10,48.55 10,49.55 10.5,50.05 11.88,50.05 12,50.17 12,51.3 U2.4 12,51.42 v12,52.67 | v7.5,95.17 6.38,95.17 J4.P2 | v7.75,87.05 7.75,86.92 8.5,86.17 8.5,70.17 v8.62,70.05
  Bottom 0.15: v27.12,20.3 27,20.17 18.5,20.17 v8.88,29.8 | v7.5,95.17 7.12,94.8 7.12,90.8 7.75,90.17 v7.75,87.05 | v8.62,70.05 7.5,68.92 7.5,61.42 12,56.92 v12,52.67
TX  (via drill 0.3)
  Top 0.15: v12,70.05 12,68.92 U2.25 | v17,70.05 32.88,85.92 33.12,85.92 TP1.TP
  Bottom 0.15: v17,70.05 v12,70.05
USB_D+  (via drill 0.3)
  Top 0.15: v149.88,59.42 151.38,59.42 D1.1 | v24.62,52.92 24.62,51.42 U2.14
  Bottom 0.15: v149.88,59.42 142.5,66.8 79.62,66.8 78.88,67.55 78.88,67.67 78.5,68.05 68.88,68.05 67.5,69.42 64.88,69.42 49.12,53.67 25.38,53.67 v24.62,52.92
VBAT
  Top 0.3: MCP73831.3 126.62,33.17 126.62,32.55 126.75,32.42 126.75,31.42 C2_BAT.2 126.75,31.3 126.75,30.67 136.12,30.67 136.5,31.05 137.62,31.05 | U4.3 137.25,30.3 137.62,30.3 U4.2 137.62,30.42 137.62,31.05 | 138.62,39.17 138.75,39.05 140.25,39.05 140.38,38.92 141.88,38.92 TP3.TP | 138.62,39.17 138.5,39.3 138.5,40.55 Q1.3 | 137.62,31.05 137.62,38.17 138.62,39.17
VBUS  (via drill 0.35)
  Top 0.3: C4_USB.1 157.25,63.17 153.12,63.17 153.12,62.3 C5_USB.1 153.12,62.17 153.12,60.55 152.75,60.17 152.75,58.55 152.88,58.42 153.88,58.42 D1.5 154,58.42 155,58.42 155.12,58.3 155.12,54.17 154.88,53.92 153.62,53.92 PFMF.050.1.2 | 126.62,37.55 127.25,37.55 CHG_LED.A 127.38,37.55 130.38,37.55 137,44.17 D2.2 | 126.62,37.55 126.62,35.92 MCP73831.4 | 126.62,37.55 125.75,37.55 125.62,37.67 125.12,37.67 125.12,37.17 C1_BAT.2 | Q1.1 139.38,42.8 139.38,44.05 139.25,44.17 137.38,44.17 137.25,44.05 137.12,44.17 D2.2 | D2.2 137.25,44.3 137.25,45.3 137.12,45.42 135.88,45.42 135.88,46.17 R1_PWRUSB.2 135.88,46.3 135.88,47.8 136,47.92 136,53.17 135.38,53.17 TP14.TP 136.12,53.17 136.88,53.17 137.62,53.92 153.5,53.92 PFMF.050.1.2 | PFMF.050.1.2 v157.99,49.47 v158,49.47 | J2.B9 161.7,51.75 162.62,52.67 v162.9,52.67
  Bottom 0.3: v158,49.47 159.56,49.47 161.81,51.72 162.04,51.72 162.9,52.57 v162.9,52.67
VRTC
  Top 0.15: R_CAPACITOR.2 99.5,55.3 99.62,55.42 | 99.62,55.42 99.75,55.55 100,55.55 C10_SUPERCAP.2 99.62,55.42 | U3.14 86,57.92 86,58.67 88.62,61.3 89.75,61.3 C8.1 89.88,61.42 89.88,61.8 90.38,62.3 93.38,62.3 99.62,56.05 99.62,55.42
VUSB
  Top 0.3: J2.A9 161,56.42 161,56.17 J2.B4 160.88,56.17 159.62,56.17 159.38,55.92 159.38,51.3 | 159.38,51.3 160.88,51.3 J2.A4 | PFMF.050.1.1 153.62,49.42 156.91,49.42 157.67,48.67 158.33,48.67 158.81,49.14 158.81,50.73 159.38,51.3